# Altium PCB E1706D_Demo_0.PcbDoc
Units mil, origin at the board's own origin, x right, y up, seen from the top; angles counter-clockwise.
Board outline 3845 x 2965 mil, 2 copper layers (Top Layer, Bottom Layer); 38 components, 38 nets, 126 pads, 8 vias.
Unrouted connection lines stored in the file: 23.
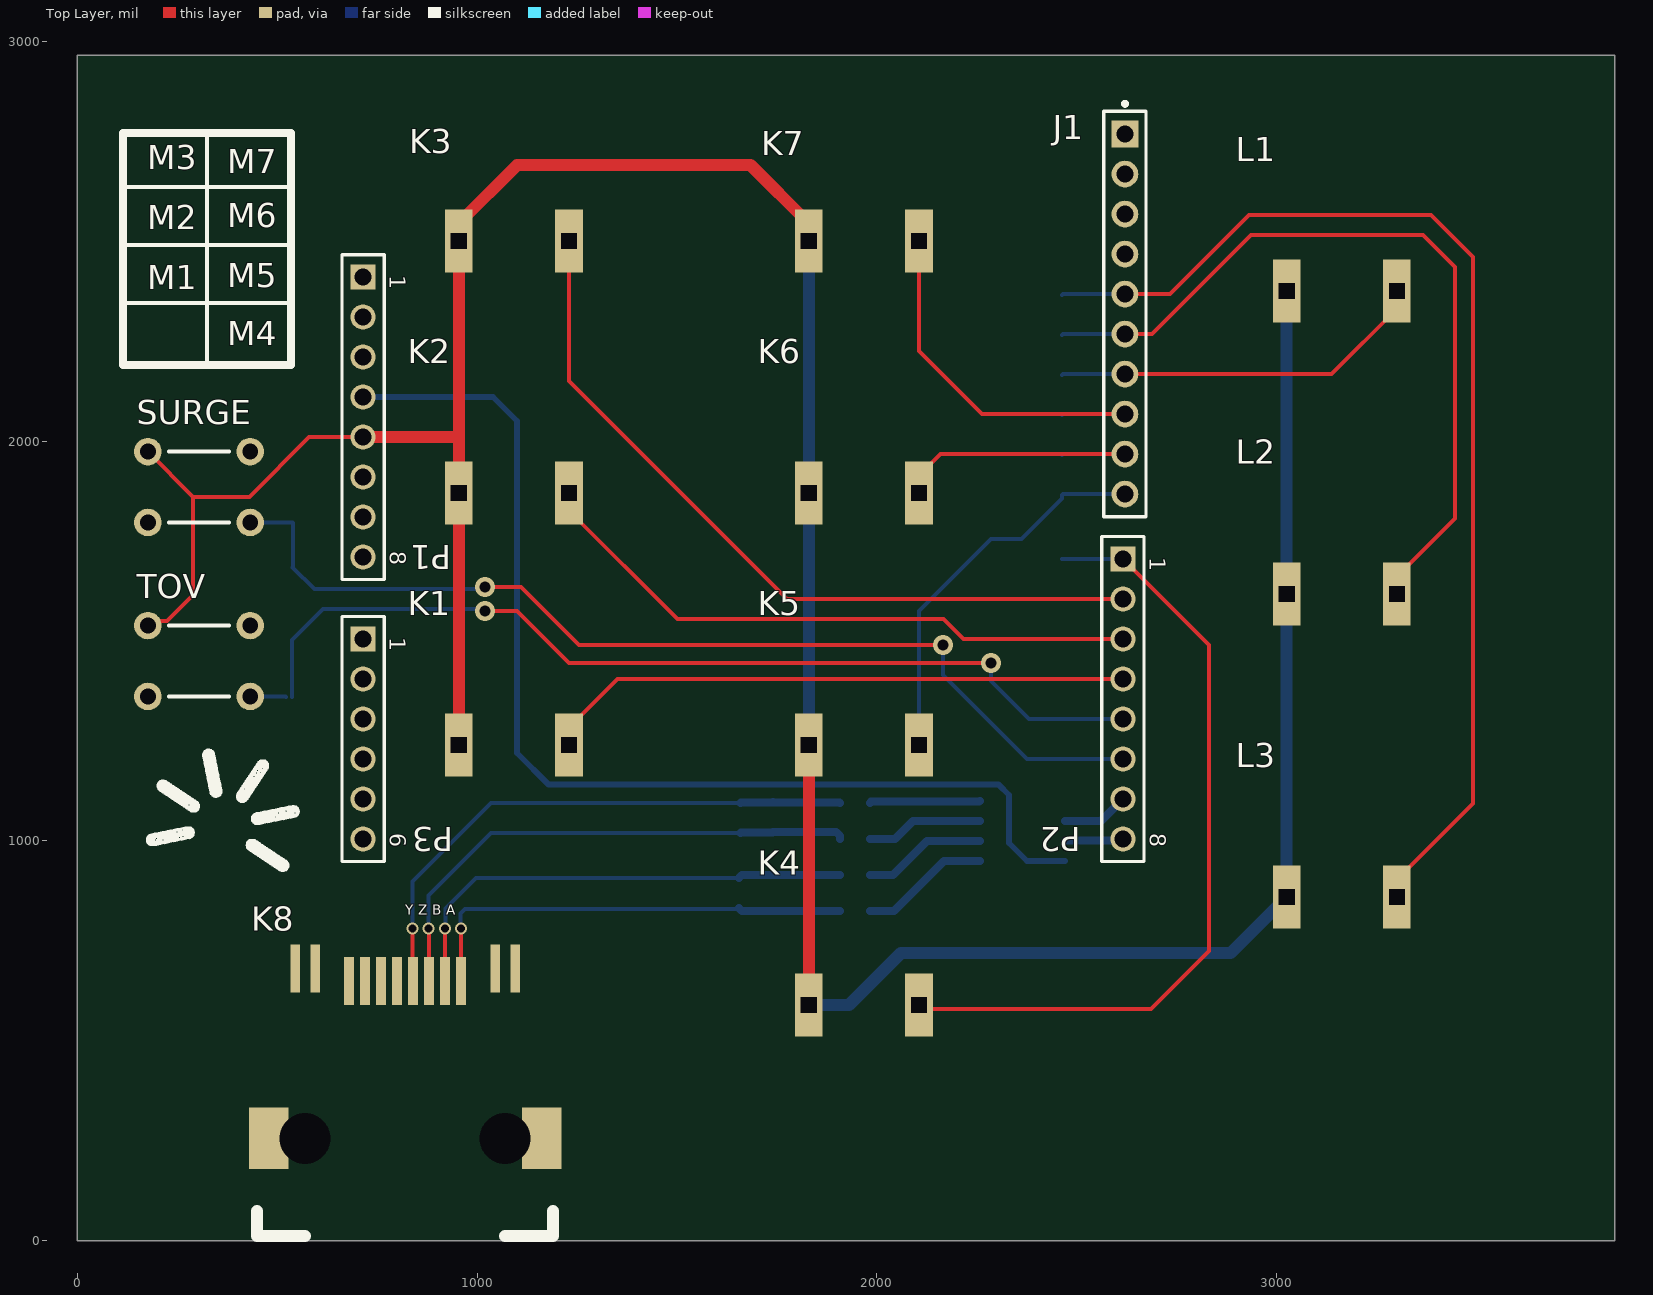
[diagram p0: Top Layer view]
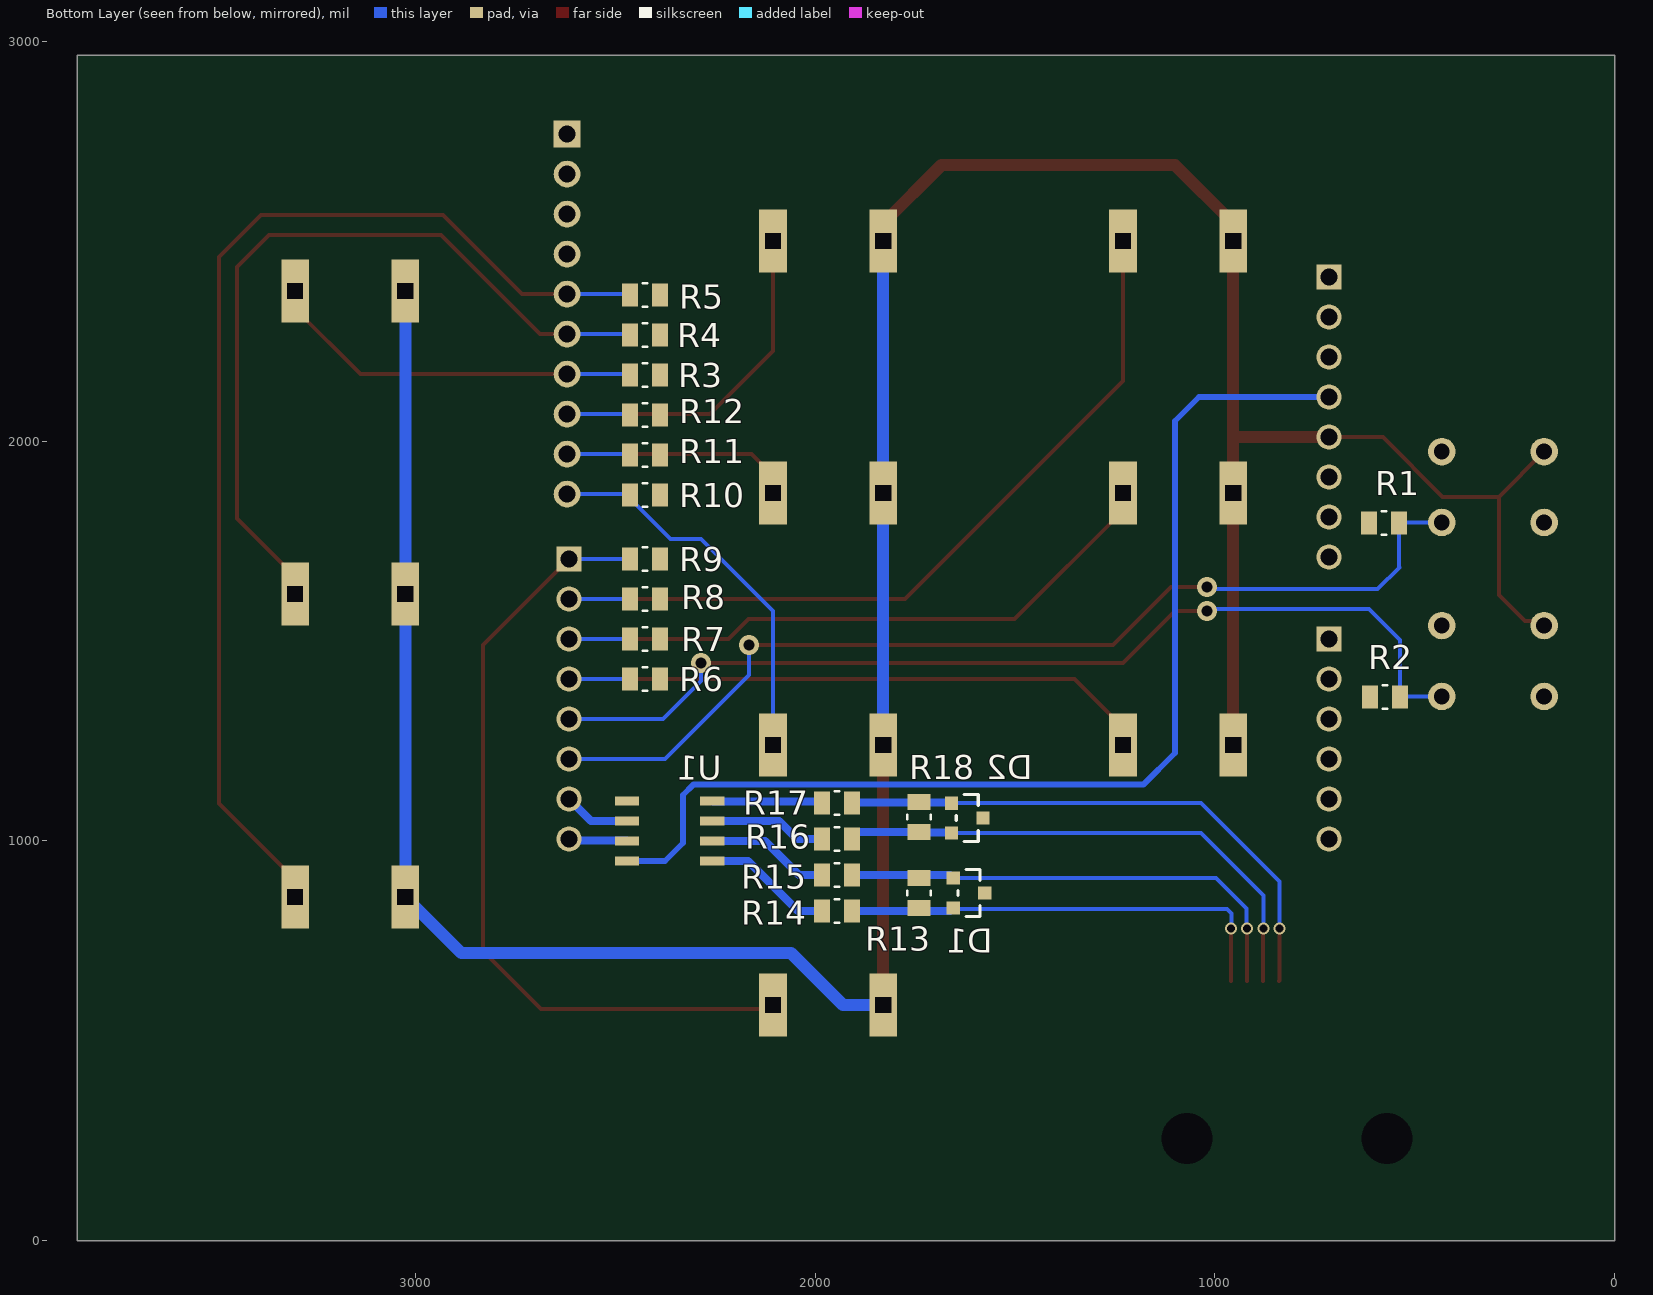
[diagram p1: Bottom Layer view, seen from below]
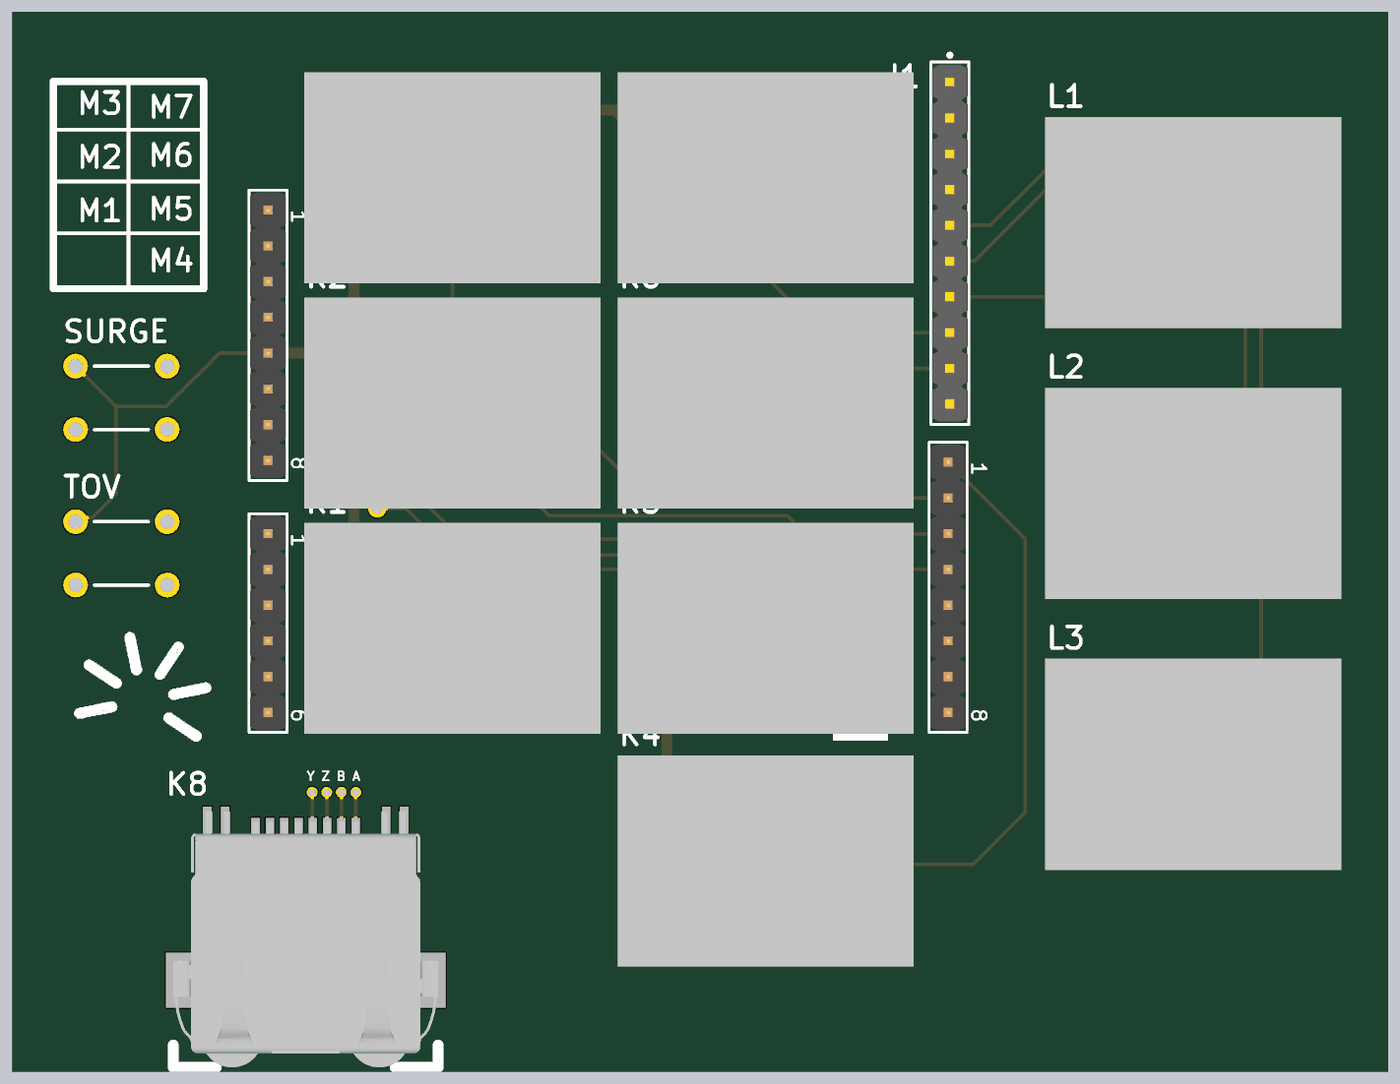
[diagram p2: 3D render of the assembled board from above, using the file's embedded part models]
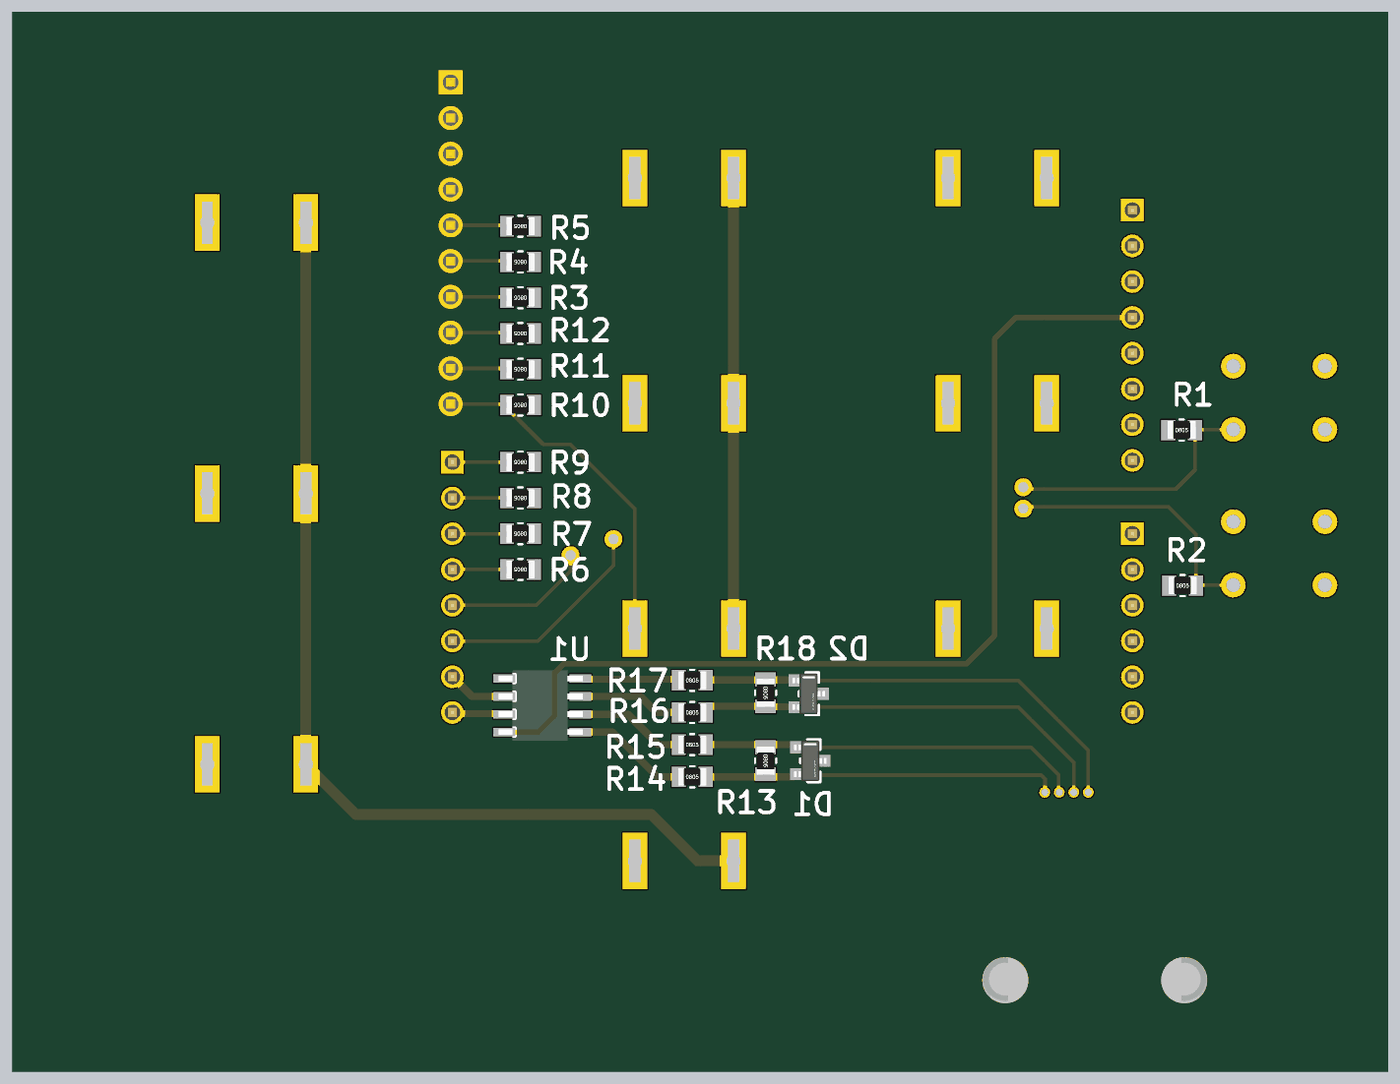
[diagram p3: 3D render of the assembled board from below, using the file's embedded part models]

## Layer stack, top to bottom
Top Solder: solder mask 0.4, Solder Resist, Dk 3.5
Top Layer: signal copper 1.4
Dielectric 1: dielectric 12.6, FR-4, Dk 4.8
Bottom Layer: signal copper 1.4
Bottom Solder: solder mask 0.4, Solder Resist, Dk 3.5

## Board outline
0,0 0,2965 3845,2965 3845,0

## Design rules (kind name [scope] priority, off if disabled: settings)
Clearance [All] p1: gap=10 ignorepadtopadclearanceinfootprint=FALSE except(0: Arc-Hole Track-Hole SMDPad-Hole THPad-Hole Via-Hole Fill-Hole Poly-Hole Region-Hole Text-Hole)
PolygonConnect [All] p1: connectstyle=Relief reliefconductorwidth=10 reliefentries=4 polygonreliefangle="90 Angle" airgapwidth=10
RoomDefinition E1706R_Schematic [InComponentClass('E1706R_Schematic')] p1: confinementstyle=ConfineIn formatcopy=TRUE lockcomponents=FALSE outline -1350,-575 650,-575 650,425 -1350,425
RoomDefinition E1706D_Schematic [InComponentClass('E1706D_Schematic')] p2: confinementstyle=ConfineIn formatcopy=TRUE lockcomponents=FALSE outline -1350,4373.7 9790,4373.7 9790,5538.7 -1350,5538.7
RoutingVias [All] p1: holewidth=28 width=50 viastyle="Through Hole" minholewidth=28 minwidth=50 maxholewidth=28 maxwidth=50
SolderMaskExpansion [All] p1: expansion=4 istentingtop=FALSE
Width [All] p1: maxlimit=50 minlimit=5 preferedwidth=10
30 further rules are at their usual default settings.

## Components (designator, comment, footprint, x,y, rotation, side; value= is the part's Value field where it differs from the comment)
D1 "CDSOT23-SM712" FP-SOT23-MFG 1615,870 r180 bottom value=75pF
D2 "CDSOT23-SM712" FP-SOT23-MFG 1619.37,1057.4 r180 bottom value=75pF
J1 "61301011121" FP-61301011121-MFG 2620,2317.48 r270 top
K1 "RA11131100" RA11131100 954.41,1240 r0 top
K2 "RA11131100" RA11131100 954.41,1870 r0 top
K3 "RA11131100" RA11131100 954.41,2500 r0 top
K4 "RA11131100" RA11131100 1829.41,590 r0 top
K5 "RA11131100" RA11131100 1829.41,1240 r0 top
K6 "RA11131100" RA11131100 1829.41,1870 r0 top
K7 "RA11131100" RA11131100 1829.41,2500 r0 top
K8 "6339191-5" 6339191-5 680,650 r0 top
L1 "RA11131100" RA11131100 3024.41,2375 r0 top (schematic designator K9)
L2 "RA11131100" RA11131100 3024.41,1617.5 r0 top (schematic designator K10)
L3 "RA11131100" RA11131100 3024.41,860 r0 top (schematic designator K11)
P1 "61300811121" 61300811121 715,2060 r270 top
P2 "61300811121" 61300811121 2615,1355 r270 top
P3 "61300611121" 61300611121 715,1255 r270 top
R1 "10K" RESC2012N 577.4,1795 r180 bottom
R2 "10K" RESC2012N 575,1360 r180 bottom
R3 "10K" RESC2012N 2425,2165 r0 bottom
R4 "10K" RESC2012N 2425,2265 r0 bottom
R5 "10K" RESC2012N 2425,2365 r0 bottom
R6 "150" RESC2012N 2425,1405 r0 bottom
R7 "150" RESC2012N 2425,1505 r0 bottom
R8 "150" RESC2012N 2425,1605 r0 bottom
R9 "150" RESC2012N 2425,1705 r0 bottom
R10 "150" RESC2012N 2425,1865 r0 bottom
R11 "150" RESC2012N 2425,1965 r0 bottom
R12 "150" RESC2012N 2425,2065 r0 bottom
R13 "Res_120_0805" RESC2012N 1740,870 r270 bottom
R14 "Res_10_0805" RESC2012N 1945,825 r180 bottom
R15 "Res_10_0805" RESC2012N 1945,915 r180 bottom
R16 "Res_10_0805" RESC2012N 1945,1005 r180 bottom
R17 "Res_10_0805" RESC2012N 1945,1095 r180 bottom
R18 "Res_120_0805" RESC2012N 1740,1060 r270 bottom
SURGE "PTS645SL50-2 LFS" "PTS645SL50-2 LFS" 305,1885 r0 top (schematic designator SW1)
TOV "PTS645SL50-2 LFS" "PTS645SL50-2 LFS" 305,1450 r0 top (schematic designator SW2)
U1 "SN65HVD71DR" SN65HVD71DR 2470,950 r90 bottom

## Footprints (in the part's own frame and the unit in brackets; to place one, negate y for a bottom-side part, rotate by r counter-clockwise, add the part's x,y. Pads: shape width x height; smd on the part's side, far side on the other; paste and mask are expansions set on the pad)
6339191-5 [mm]
  rect 2.5x3.9 smd: 0(-5.11,-10) 0(12.23,-10)
  rect 0.61x3.05 smd: 0(-3.425,0.8) 0(-2.155,0.8) 0(9.275,0.8) 0(10.545,0.8) 1(0,0) 2(1.016,0) 3(2.032,0) 4(3.048,0) 5(4.064,0) 6(5.08,0) 7(6.096,0) 8(7.112,0)
  round 1.524 hole 3.25: 0(-2.79,-10) 0(9.91,-10)
  silkscreen extent -5.84,-16.2 12.96,-14.6, body extent -5.84,-16.2 12.96,1.97, height 14.92
61300611121 [mm] "Pin Header, pitch 2.54 mm, THT, Vertical, single row, 6p"
  rect 1.6x1.6 hole 1.1: 1(-6.35,0)
  round 1.6 hole 1.1: 2(-3.81,0) 3(-1.27,0) 4(1.27,0) 5(3.81,0) 6(6.35,0)
  silkscreen extent -7.77,-1.35 7.77,1.35, body extent -7.62,-1.27 7.62,1.27, height 8.57
61300811121 [mm] "Pin Header, pitch 2.54 mm, THT, Vertical, single row, 8p"
  rect 1.6x1.6 hole 1.1: 1(-8.89,0)
  round 1.6 hole 1.1: 2(-6.35,0) 3(-3.81,0) 4(-1.27,0) 5(1.27,0) 6(3.81,0) 7(6.35,0) 8(8.89,0)
  silkscreen extent -10.31,-1.35 10.31,1.35, body extent -10.16,-1.27 10.16,1.27, height 8.57
FP-61301011121-MFG [mm]
  rect 1.7x1.7 hole 1.1 paste-1000 mask+0: 1(-11.43,0)
  round 1.7 hole 1.1 paste-1000 mask+0: 2(-8.89,0) 3(-6.35,0) 4(-3.81,0) 5(-1.27,0) 6(1.27,0) 7(3.81,0) 8(6.35,0) 9(8.89,0) 10(11.43,0)
  silkscreen extent -13.47,-1.35 12.88,1.35, body extent -12.98,-1.45 12.98,1.45, height 0.25
FP-SOT23-MFG [mm]
  rect 0.85x0.85 smd paste+0 mask+0: 1(-1,-0.95) 2(-1,0.95) 3(1,0)
  silkscreen extent -0.7,-1.5 0.7,1.5, body extent -1.15,-1.45 1.15,1.45, height 1.17
"PTS645SL50-2 LFS" [mm]
  round 1.75 hole 1: 1(-3.25,2.25) 2(3.25,2.25) 3(-3.25,-2.25) 4(3.25,-2.25)
  silkscreen extent -1.91,-2.25 1.91,2.25, body extent -3.25,-2.92 3.25,2.92, height 3.45
RA11131100 [mm] "Rocker Switch"
  rect 1.75x4 hole 1 square: 1(0,0) 2(7,0)
  body extent -3.5,-7.5 17.5,7.5, height 12.3
RESC2012N [mm] "Chip Resistor, Body 2.0x1.3mm, IPC Med Density"
  rect 1x1.45 smd: 1(-0.95,0) 2(0.95,0)
  silkscreen extent -0.15,-0.75 0.15,0.75, body extent -1,-0.63 1,0.63, height 0.59
SN65HVD71DR [mm] "SOIC-8"
  rect 0.6x1.55 smd: 1(0,0) 2(1.27,0) 3(2.54,0) 4(3.81,0) 5(3.81,-5.4) 6(2.54,-5.4) 7(1.27,-5.4) 8(0,-5.4)
  body extent -0.59,-5.59 4.41,0.41, height 0.18

## Part data
D1 D2: library part CMP-2000-05081-2, "TVS DIODE 7V/12V 14V/26V SOT23-3", Breakdown Voltage=7.5V, Capacitance=75pF, Case/Package=SOT-23, Clamping Voltage=26V, Leakage Current=20uA, Manufacturer="Bourns Inc.", Max Breakdown Voltage=13.3V, Max Operating Temperature=150°C, Max Power Dissipation=600W, Max Surge Current=30A, Min Operating Temperature=-55°C, Package=SOT23, Package Quantity=1, Peak Pulse Current=17A, Peak Pulse Power=400W, Power Line Protection=No, Resistor Type=Zener, Reverse Standoff Voltage=12V, Supplier Part Number 1=CDSOT23-SM712CT-ND, Temperature="-55°C to +150°C", Temperature Range High=+150°C, Test Current=1mA, Automotive=No, Category=Diode, ComponentLink1Description=https://datasheet.ciiva.com/1281/1670933-1281331.pdf?src-supplier=Farnell, ComponentLink1URL=https://datasheet.ciiva.com/1281/1670933-1281331.pdf?src-supplier=Farnell, ComponentLink2Description=Datasheet, ComponentLink2URL=https://www.bourns.com/docs/Product-Datasheets/CDSOT23-SM712.pdf, ComponentLink3Description=https://datasheet.ciiva.com/4510/cdsot23-sm712-25932-4510261.pdf?src-supplier=Mouser, ComponentLink3URL=https://datasheet.ciiva.com/4510/cdsot23-sm712-25932-4510261.pdf?src-supplier=Mouser, ComponentLink4Description=https://datasheet.ciiva.com/11193/cdsot23-sm712-11193846.pdf?src-supplier=Avnet, ComponentLink4URL=https://datasheet.ciiva.com/11193/cdsot23-sm712-11193846.pdf?src-supplier=Avnet, ComponentLink5Description=https://datasheet.ciiva.com/16582/cdsot23-sm712-16582189.pdf?src-supplier=Avnet+Europe, ComponentLink5URL=https://datasheet.ciiva.com/16582/cdsot23-sm712-16582189.pdf?src-supplier=Avnet+Europe, ComponentLink6Description=https://datasheet.ciiva.com/337/cdsot23-sm712-337451.pdf?src-supplier=Digi-Key, ComponentLink6URL=https://datasheet.ciiva.com/337/cdsot23-sm712-337451.pdf?src-supplier=Digi-Key, ComponentLink7Description=https://datasheet.ciiva.com/337/cdsot23-sm712-337452.pdf?src-supplier=Digi-Key, ComponentLink7URL=https://datasheet.ciiva.com/337/cdsot23-sm712-337452.pdf?src-supplier=Digi-Key, ComponentLink8Description=https://datasheet.ciiva.com/26828/getdatasheetpartid-418501-26828522.pdf?src-supplier=Verical, ComponentLink8URL=https://datasheet.ciiva.com/26828/getdatasheetpartid-418501-26828522.pdf?src-supplier=Verical, ComponentLink9Description=https://datasheet.ciiva.com/22696/1670933-22696779.pdf?src-supplier=Element14, ComponentLink9URL=https://datasheet.ciiva.com/22696/1670933-22696779.pdf?src-supplier=Element14, Contact Plating=Tin, Depth=1.4mm, Device Class L1="Circuit Protection", Device Class L2="TVS Diodes", Device Class L3=unset, Digikey Description="TVS DIODE 7V/12V 14V/26V SOT23-3", Diode Type=ZENER, Direction=Bidirectional, Element Configuration=Dual, ESD Protection=Yes, Height=1.17mm, Ipc Land Pattern Name=SOT95P229X103-3, Lead Free=Yes, Length=3.04mm, Manufacturer Part Number=CDSOT23-SM712, Max Reverse Leakage Current=20uA, Min Breakdown Voltage=13.3V, Mount="Surface Mount", Mouser Description="Transient Voltage Suppressor, TVS, CDSOT23 Series, Unidirectional, 12 V, SOT-23, 3, 13.3 V", Number of Bidirectional Channels=2, Number of Channels=2, Number of Elements=2, Number of Pins=3, Octopart=https://octopart.com/cdsot23-sm712-bourns-7576327, Packaging="Tape and Reel", Polarity=Bidirectional,Unidirectional, Power Dissipation=400W, Pricing 1="1=1.63000, 10=1.46000, 100=1.13850, 500=0.94050, 1000=0.74250 (USD)", Radiation Hardening=No, REACH SVHC="No SVHC", Reverse Breakdown Voltage=13.3V, RoHS=TRUE, RoHS Compliant=Yes, Series=-, Standoff Height=0.05mm, Stock 1=37537, Supplier 1=Digi-Key, Temperature Range Low=-55°C, Termination=SMD/SMT, Width=0.055inch, Working Voltage=12V
J1: library part CMP-1502-01082-2, "CONN HEADER VERT 10POS 2.54MM", Color=Black, Current Rating=3A, Flammability Rating="UL94 V-0", Insulation Resistance=1GR, Max Operating Temperature=105°C, Min Operating Temperature=-40°C, Package Quantity=1000, Voltage Rating=250V, Connector Type=Header, Contact Finish - Mating=GOLD, Contact Gender=Male, Contact Material="Copper Alloy", Contact Mating Length=0.236inch, Contact Plating=Gold, Contact Shape=Square, Contact Type="Male Pin", Fastening Type=Pull, Gender=Male, Height=11.54mm, Housing Material=PBT, Insulation Color=Black, Insulation Material=Nylon, Length=2.54mm, Mount="Through Hole", Number of Contacts=10, Number of Positions=10, Number of Rows=1, Orientation=Straight, Packaging=Bulk, Pitch=2.54mm, RoHS Compliant=Yes, Series=WR-PHD, Termination=Solder, Width=25.4mm
P1 P2: library part CMP-1502-01076-1, "THT Vertical Pin Header WR-PHD, Pitch 2.54 mm, Single Row, 8 pins", Contact Resistance=20mOhm, Manufacturer="Wurth Elektronik", Operating Temperature=-40to105degC, Rated Current=3A, Withstanding Voltage=500VAC, Working Voltage=250VAC, Datasheet URL=https://katalog.we-online.de/em/datasheet/6130xx11121.pdf, Gender=Male, Manufacturer URL=http://www.we-online.de, Mounting Technology=THT, Orientation=Vertical, Package Reference=61300811121, Packaging=Bag, Part Number=61300811121, Pin Number=8, Pitch=2.54mm, Publisher=WurthElektronik, Row Number=Single
P3: library part CMP-1502-01070-1, "THT Vertical Pin Header WR-PHD, Pitch 2.54 mm, Single Row, 6 pins", Contact Resistance=20mOhm, Manufacturer="Wurth Elektronik", Operating Temperature=-40to105degC, Rated Current=3A, Withstanding Voltage=500VAC, Working Voltage=250VAC, Datasheet URL=https://katalog.we-online.de/em/datasheet/6130xx11121.pdf, Gender=Male, Manufacturer URL=http://www.we-online.de, Mounting Technology=THT, Orientation=Vertical, Package Reference=61300611121, Packaging=Bag, Part Number=61300611121, Pin Number=6, Pitch=2.54mm, Publisher=WurthElektronik, Row Number=Single
R1 R2 R3 R4 R5: library part Res_10K_0805, "RES 10K OHM 1/8W 1% 0805", Case Code (Imperial)=0805, Case Code (Metric)=2012, Manufacturer=Vishay, Manufacturer P/N=CRCW080510K0FKEA, Max Operating Temperature=155°C, Min Operating Temperature=-55°C, Package Quantity=5000, Power Rating=125mW, Resistance=10kR, Supplier Part Number 1=541-10.0KCCT-ND, Temperature Coefficient=100ppm/°C, Tolerance=1%, Voltage Rating=150V, Case/Package=0805, ComponentLink4Description=http://www.vishay.com/docs/20035/dcrcwe3.pdf, ComponentLink4URL=http://www.vishay.com/docs/20035/dcrcwe3.pdf, Composition="Thick Film", Contact Plating=Tin, Depth=1.25mm, Height=0.45mm, Lead Free="Lead Free", Length=2mm, Military Standard=Not, Radiation Hardening=No, REACH SVHC=Unknown, Supplier 1=Digi-Key, Termination=SMD/SMT, Voltage Rating (DC)=150V, Weight=0.000194oz, Width=1.25mm
R6 R7 R8 R9 R10 R11 R12: library part Res_150_0805, "RES 150 OHM 1/8W 1% 0805", Case Code (Imperial)=0805, Case Code (Metric)=2012, Manufacturer=Vishay, Manufacturer P/N=CRCW0805150RFKEA, Max Operating Temperature=155°C, Max Power Dissipation=125mW, Min Operating Temperature=-55°C, Package Quantity=10, Resistance=150R, Supplier Part Number 1=541-150CCT-ND, Temperature Coefficient=100ppm/°C, Tolerance=1%, Voltage Rating=150V, Case/Package=0805, ComponentLink3Description=http://www.vishay.com/docs/20035/dcrcwe3.pdf, ComponentLink3URL=http://www.vishay.com/docs/20035/dcrcwe3.pdf, Composition="Thick Film", Contact Plating=Tin, Depth=1.25mm, Features="Automotive AEC-Q200", Height=0.45mm, Lead Free="Lead Free", Length=2mm, Military Standard=Not, Mount="Surface Mount", Power Rating=125mW, Radiation Hardening=No, REACH SVHC=Unknown, Supplier 1=Digi-Key, Termination=SMD/SMT, Voltage Rating (DC)=150V, Weight=0.000194oz, Width=0.049inch
R13 R18: "RES 120 OHM 1/8W 1% 0805"
R14 R15 R16 R17: "RES 10 OHM 1/8W 1% 0805", Manufacturer="Vishay Dale", Manufacturer P/N=CRCW080510R0FKEA, Package / Case="0805 (2012 Metric)", Power (Watts)="0.125W, 1/8W", Resistance (Ohms)=10, Supplier Part Number 1=541-10.0CCT-ND, Temperature Coefficient=±100ppm/°C, Tolerance=±1%, ComponentLink1Description=Datasheet, ComponentLink1URL=http://www.vishay.com/doc?20035, Composition="Thick Film", Features="Automotive AEC-Q200 Qualified", RoHS="RoHS Compliant", Supplier 1=Digi-Key, Supplier 2=Digi-Key, Supplier Part Number 2=541-10.0CTR-ND
U1: "Single Transmitter/Receiver RS-485 8-Pin SOIC T/R", Case/Package=SOIC, Manufacturer="Texas Instruments", Max Operating Temperature=125°C, Min Operating Temperature=-40°C, Operating Supply Voltage=3.3V, Supplier Part Number 1=296-40519-1-ND, Category="RS-232 / RS-422 / RS-485 Interface ICs", ComponentLink1Description=https://datasheet.ciiva.com/48475/sn65hvd70-48475464.pdf?src-supplier=Avnet, ComponentLink1URL=https://datasheet.ciiva.com/48475/sn65hvd70-48475464.pdf?src-supplier=Avnet, Data Rate=400Kbps, Lead Free="Lead Free", Logic Function=Receiver, Manufacturer Part Number=SN65HVD71DR, Mount="Surface Mount", Number of Pins=8, Number of Transmitters=1, Packaging="Tape and Reel", Pricing 1="1=3.41000, 10=3.06300, 25=2.89520, 100=2.50930, 250=2.38064, 500=2.13616, 1000=2.12450 (USD)", Receiver Hysteresis=70mV, RoHS=Yes, RoHS Compliant=Yes, Simplex/Duplex="Full Duplex", Stock 1=1611, Supplier 1=Digi-Key

## Via types
v1: diameter 50, hole 28, Top Layer to Bottom Layer, 4 vias
v2: diameter 30, hole 20, Top Layer to Bottom Layer, 4 vias

## Nets (pads, with @x,y where several pads share a name; then routed paths per layer and width w, separated by ;. In a path a pad name is that pad's centre, name@x,y a point inside that pad or via, vN(x,y) a via of type N, cw(c..) or ccw(c..) an arc to the next point about the centre after c; other vN are vias at no path point)
3V3: P1.4 U1.1 | length 2792
  Bottom Layer w15: P1.4 1040,2110 1100,2050 1100,1220 1178.96,1141.04 2303.96,1141.04 2330,1115 2330,995 2375,950 U1.1
5V: K1.1 K2.1 K3.1 K4.1 K5.1 K6.1 K7.1 L1.1 L2.1 L3.1 P1.5 SURGE.1 TOV.1 | length 8355.3
  Top Layer w10: TOV.1 188.32,1549.85 224.85,1549.85 290,1615 290,1860.63 ; SURGE.1 290,1860.63 ; P1.5 580,2010 430.63,1860.63 290,1860.63
  Top Layer w30: P1.5 949.41,2010 954.41,2015 ; K1.1 K2.1 954.41,2015 ; K5.1 K4.1 K4.1@1829.7,590.3 ; K7.1 1829.41,2544.29 1683.7,2690 1100.12,2690 954.41,2544.29 K3.1 954.41,2015
  Bottom Layer w30: K4.1 1930,590 2060,720 2884.41,720 L3.1 L2.1 L1.1 ; K7.1 K6.1 K5.1 K5.1@1829.7,1239.7
A: D1.1 K8.8 R13.2 R14.2 | length 1126.7
  Top Layer w10: K8.8 v2(960,781.78)
  Bottom Layer w10: v2(960,781.78) 959.14,782.64 959.14,819.14 970,830 1651.77,830 D1.1
  Bottom Layer w20: D1.1 1661.97,825 R14.2
A0: P3.1
A1: P3.2
A2: P3.3
A3: P3.4
A4: P3.5
A5: P3.6
AREF: J1.3
B: D1.2 K8.7 R13.1 R15.2 | length 1203.3
  Top Layer w10: v2(919.4,781.78) 919.7,781.48 919.7,650.3 K8.7
  Bottom Layer w10: v2(919.4,781.78) 920.86,783.24 920.86,830.86 997.4,907.4 D1.2
  Bottom Layer w20: D1.2 1661.97,915 R15.2
D2: P2.6 R1.2 SURGE.4 | length 2541.2
  Top Layer w10: v1(1019.82,1635) 1110,1635 1255,1490 v1(2165,1490)
  Bottom Layer w10: SURGE.4 538.58,1796.42 R1.2 540,1685 539.14,1684.14 593.28,1630 1014.82,1630 v1(1019.82,1635) ; v1(2165,1490) 2165,1415 2375,1205 P2.6
D3: P2.5 R2.2 TOV.4 | length 2482.6
  Top Layer w10: v1(1020,1575) 1100,1575 1230,1445 v1(2285,1445)
  Bottom Layer w10: TOV.4 521.18,1361.42 R2.2@522.6,1360 ; R2.2 537.6,1502.6 615,1580 1015,1580 v1(1020,1575) ; v1(2285,1445) 2285,1400 2380,1305 P2.5
D4: K1.2 P2.4 R6.2 | length 1631.9
  Top Layer w10: K1.2 1230,1284.29 1350.71,1405 P2.4
  Bottom Layer w10: R6.2 P2.4
D5: K2.2 P2.3 R7.2 | length 1714.7
  Top Layer w10: K2.2 1230,1825.71 1500.71,1555 2166.57,1555 2216.57,1505 P2.3
  Bottom Layer w10: R7.2 P2.3
D6: K3.2 P2.2 R8.2 | length 2113.3
  Top Layer w10: K3.2 1230,2150 1775,1605 P2.2
  Bottom Layer w10: R8.2 P2.2
D7: K4.2 P2.1 R9.2 | length 2010.9
  Top Layer w10: K4.2 2115,580 2685,580 2830,725 2830,1490 P2.1
  Bottom Layer w10: R9.2 P2.1
D8: J1.10 K5.2 R10.2 | length 976.3
  Bottom Layer w10: K5.2 2105,1575 2285,1755 2361.26,1755 2462.4,1856.14 R10.2 2464.88,1867.48 J1.10
D9: J1.9 K6.2 R11.2 | length 739.9
  Top Layer w10: K6.2 2105,1914.29 2158.19,1967.48 J1.9
  Bottom Layer w10: R11.2 2464.88,1967.48 J1.9
D10: J1.8 K7.2 R12.2 | length 1013.9
  Top Layer w10: K7.2 2105,2225 2262.52,2067.48 J1.8
  Bottom Layer w10: R12.2 2464.88,2067.48 J1.8
D11: J1.7 L1.2 R3.2 | length 950.5
  Top Layer w10: J1.7 3136.77,2167.48 3300,2330.71 L1.2
  Bottom Layer w10: R3.2 2464.88,2167.48 J1.7
D12: J1.6 L2.2 R4.2 | length 1996.9
  Top Layer w10: J1.6 2687.48,2267.48 2935,2515 3365,2515 3445,2435 3445,1806.79 3300,1661.79 L2.2
  Bottom Layer w10: R4.2 2464.88,2267.48 J1.6
D13: J1.5 L3.2 R5.2 | length 2832.6
  Top Layer w10: J1.5 2732.48,2367.48 2930,2565 3385,2565 3490,2460 3490,1094.29 3300,904.29 L3.2
  Bottom Layer w10: R5.2 2464.88,2367.48 J1.5
GND: D1.3 D2.3 J1.4 K8.0@478.82,256.3 K8.0@1161.5,256.3 K8.1 K8.2 K8.3 K8.4 P1.6 P1.7 R1.1 R2.1 R3.1 R4.1 R5.1 R6.1 R7.1 R8.1 R9.1 R10.1 R11.1 R12.1 U1.4
IOREF: P1.2
NC: P1.1
NetR14_1: R14.1 U1.8 | length 326.8
  Bottom Layer w20: R14.1 2042.72,825 2167.72,950 U1.8
NetR15_1: R15.1 U1.7 | length 310.2
  Bottom Layer w20: R15.1 2040,915 2125,1000 U1.7
NetR16_1: R16.1 U1.6 | length 293.6
  Bottom Layer w20: R16.1 2045,1005 2090,1050 U1.6
NetR17_1: R17.1 U1.5 | length 277.1
  Bottom Layer w20: R17.1 1985.59,1098.19 2255.59,1098.19 U1.5
RESET: P1.3
RX: P2.8 U1.2 | length 147.1
  Bottom Layer w20: U1.2 2471.81,1001.81 2611.81,1001.81 P2.8
SCL: J1.1
SDA: J1.2
TX: P2.7 U1.3 | length 167.8
  Bottom Layer w20: U1.3 2560,1050 P2.7
VIN: P1.8
Y: D2.2 K8.5 R17.2 R18.1 | length 1401.9
  Top Layer w10: v2(838.19,781.78) 839.09,780.88 839.09,650.91 K8.5
  Bottom Layer w10: v2(838.19,781.78) 838.19,898.19 1034.8,1094.8 D2.2
  Bottom Layer w20: D2.2 1660.04,1096.1 1738.7,1096.1 R18.1 1741.2,1096.2 1906.4,1096.2 R17.2
Z: D2.1 K8.6 R16.2 R18.2 | length 1320.8
  Top Layer w10: v2(878.79,781.78) 879.4,781.18 879.4,650.6 K8.6
  Bottom Layer w10: 878.51,863.79 1034.71,1020 ; v2(878.79,781.78) 878.79,863.79 ; 1035,1020 D2.1
  Bottom Layer w20: D2.1 1660.04,1021.3 1738.7,1021.3 R18.2 1897.91,1022.6 1907.6,1012.91 R16.2
pads on no net: K8.0@545.16,681.5 K8.0@570.16,256.3 K8.0@595.16,681.5 K8.0@1045.16,681.5 K8.0@1070.16,256.3 K8.0@1095.16,681.5 SURGE.2 SURGE.3 TOV.2 TOV.3

## Silkscreen, mask and mechanical layers (free items; w line width, h text height)
Top Overlay:
  drawing of 14 lines, arcs and shapes, not listed
  text "M3" at 175,2680 h60
  text "M7" at 375,2670 h60
  text "M6" at 375,2535 h60
  text "M2" at 175,2530 h60
  text "M5" at 375,2385 h60
  text "M1" at 175,2380 h60
  text "M4" at 375,2240 h60
  text "Y Z B A" at 820,815 h25
Mechanical 1:
  the board outline again, w30

## Text inside footprints (layer, text, board x,y; h text height)
P1: Top Overlay "8" at 781.93,1724.96 h40 r270; Top Overlay "1" at 781.93,2414.72 h40 r270
P2: Top Overlay "8" at 2681.93,1019.96 h40 r270; Top Overlay "1" at 2681.93,1709.72 h40 r270
P3: Top Overlay "1" at 781.93,1509.72 h40 r270; Top Overlay "6" at 781.93,1019.96 h40 r270